# EAGLE board stm32f4mppt (EAGLE 9.6.2)
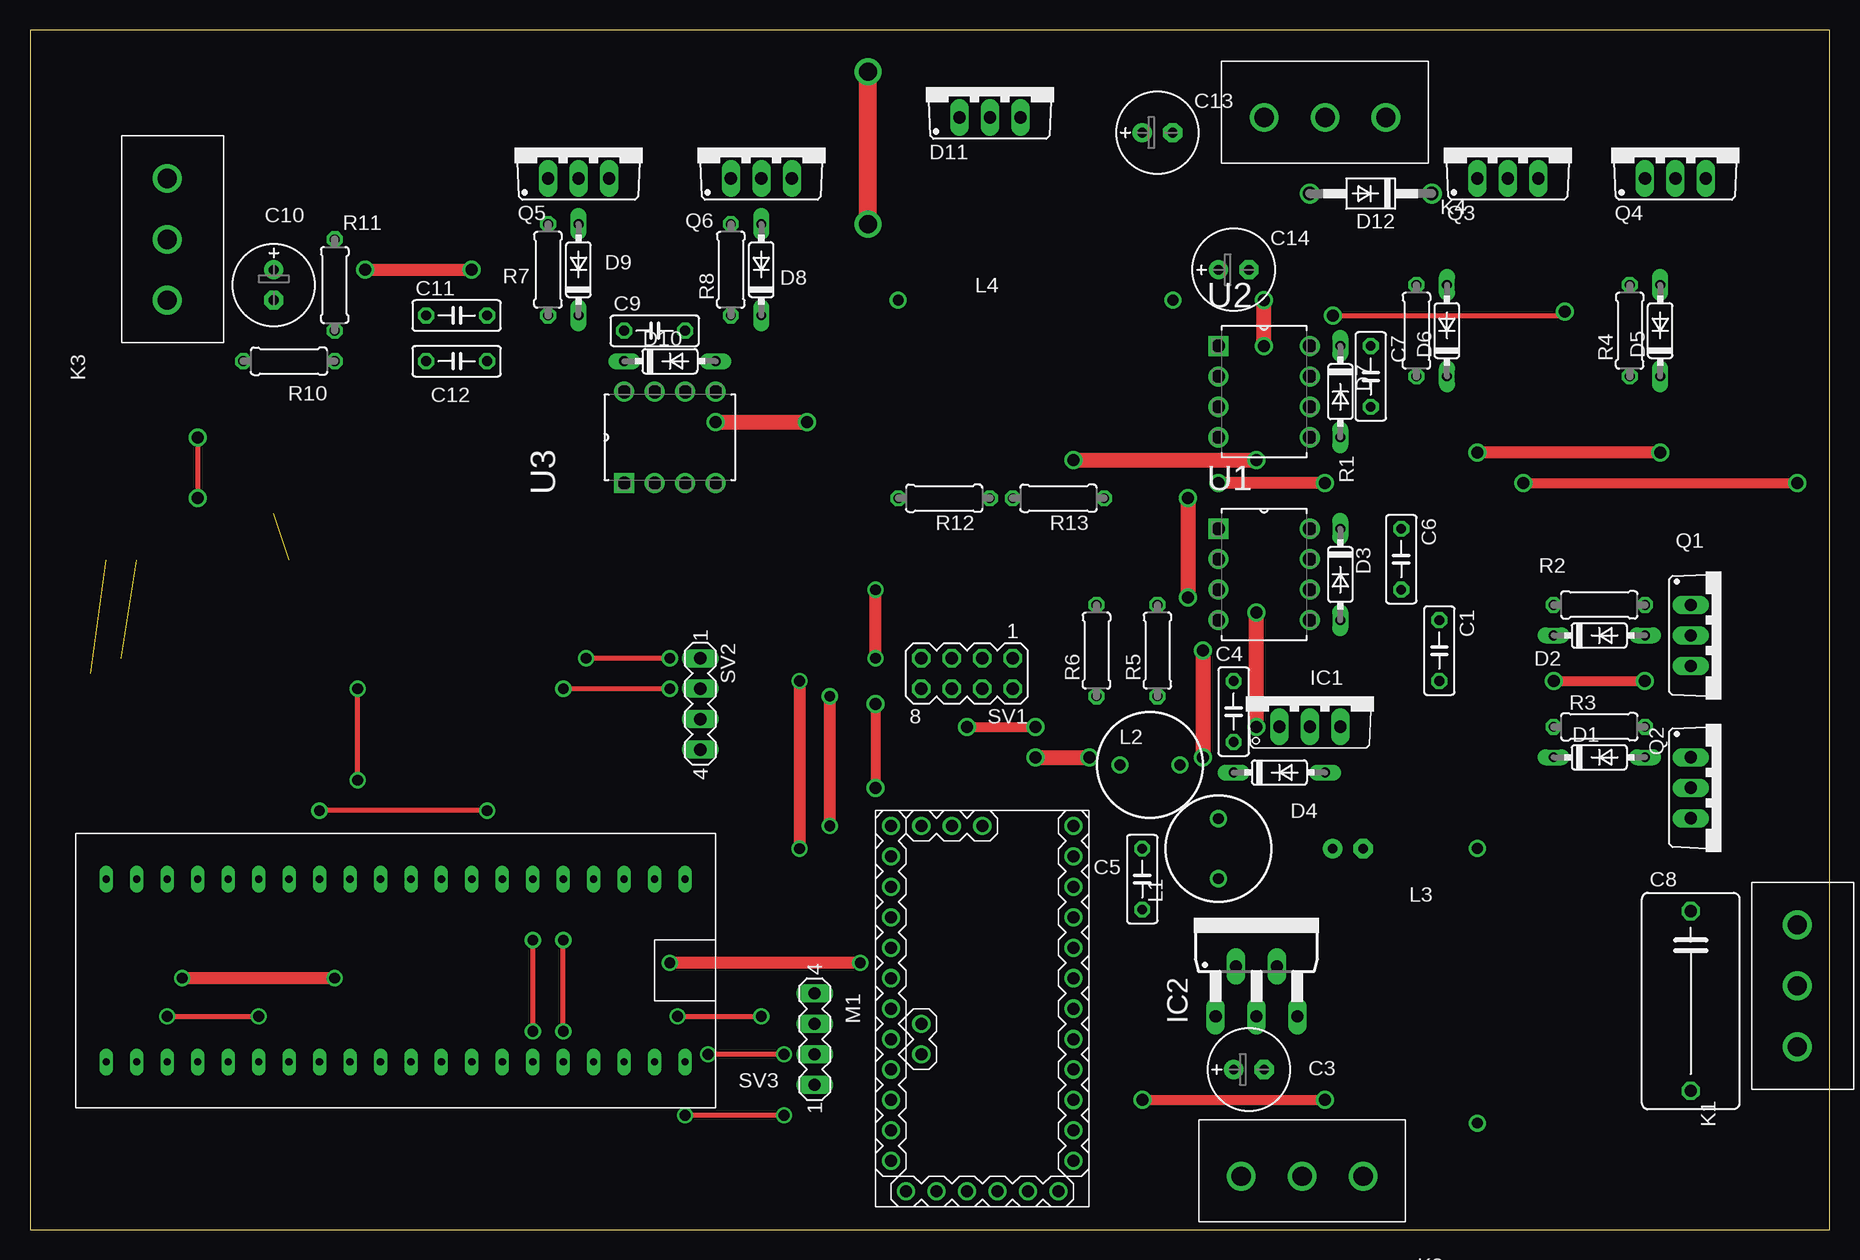
[diagram p0: board, top side]
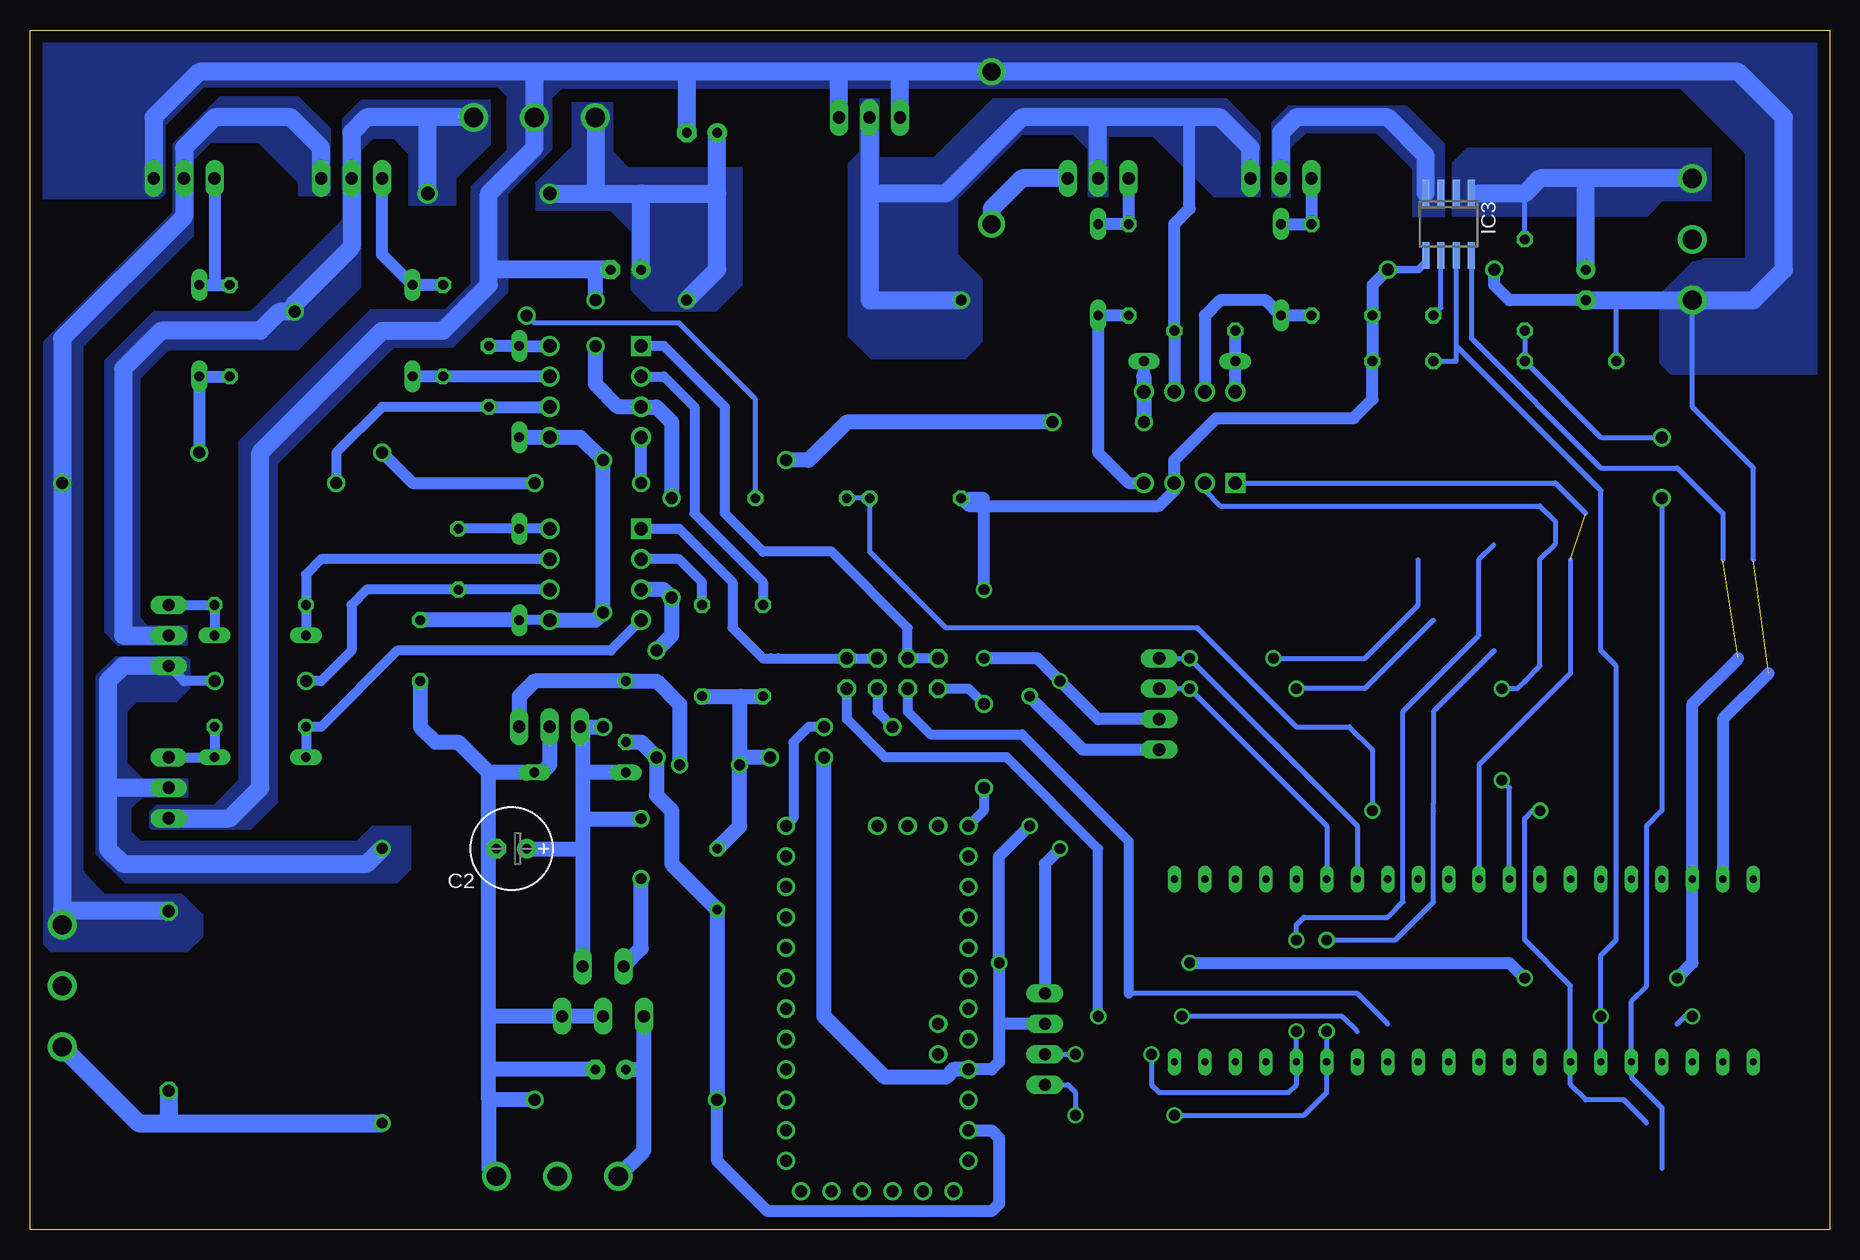
[diagram p1: board, bottom side, seen from below]

Size 150 x 100 mm. Coordinates in mm from the lower left corner, seen from the top.
Outline: 0,0 150,0 150,100 0,100 0,0
Copper layers (1*16): Top 0.035mm / dielectric 1.5mm / Bottom 0.035mm
Design rules "default": minimum track width 6mil, minimum drill 0.35mm, track to track 6mil, track to pad 6mil, pad to pad 6mil, via to via 6mil, smd to smd 6mil, copper to edge 40mil, drill to drill 6mil, minimum pad ring 10mil, minimum via ring 8mil, stop-mask expansion 4mil, vias tented up to drill 0mil, thermal gap 10mil

## Footprints (pad centres in the part's own frame; a part is rotated, then mirrored left to right if it is on the bottom)
C050-025X075 = drill 0.813 octagon: 1 -2.54,0; 2 2.54,0
E2,5-7 = drill 0.813 pad 1.6: + -1.27,0 | drill 0.813 pad 1.6 octagon: - 1.27,0
C150-084X183 = drill 1.016 octagon: 1 -7.493,0; 2 7.493,0
DO35-7 = drill 0.813 long: A 3.81,0; C -3.81,0
TO220ABS = drill 1.016 long: A1 -2.54,-2.54; A2 2.54,-2.54; C 0,-2.54
DO41-10 = drill 1.118: A 5.08,0; C -5.08,0
TO220V = drill 1.016 long: 1 -2.54,-2.54; 2 0,-2.54; 3 2.54,-2.54
T05D = drill 1.016 long: 1 -3.404,-5.08; 2 -1.702,-0.914; 3 0,-5.08; 4 1.702,-0.914; 5 3.404,-5.08
SOIC8 = smd 0.6 x 2.2: 1 -1.905,-2.6; 2 -0.635,-2.6; 3 0.635,-2.6; 4 1.905,-2.6; 5 1.905,2.6; 6 0.635,2.6; 7 -0.635,2.6; 8 -1.905,2.6
691311500103 = drill 1.6: 1 -5.08,0; 2 0,0; 3 5.08,0
6000-XXXX-RC = drill 0.9 pad 1.422: 1 -2.5,0; 2 2.5,0
TJ5-U2 = drill 0.9: 1 -11.45,0; 2 11.45,0
ARDUINO-PRO-MINI = drill 1: J1.1 -15.24,6.35; J1.2 -15.24,3.81; J1.3 -15.24,1.27; J1.4 -15.24,-1.27; J1.5 -15.24,-3.81; J1.6 -15.24,-6.35; J2.1 -1.27,5.08; J2.2 -3.81,5.08; J3.1 15.24,0; J3.2 15.24,2.54; J3.3 15.24,5.08; J6.1 -12.7,7.62; J6.2 -10.16,7.62; J6.3 -7.62,7.62; J6.4 -5.08,7.62; J6.5 -2.54,7.62; J6.6 0,7.62; J6.7 2.54,7.62; J6.8 5.08,7.62; J6.9 7.62,7.62; J6.10 10.16,7.62; J6.11 12.7,7.62; J6.12 15.24,7.62; J7.1 15.24,-7.62; J7.2 12.7,-7.62; J7.3 10.16,-7.62; J7.4 7.62,-7.62; J7.5 5.08,-7.62; J7.6 2.54,-7.62; J7.7 0,-7.62; J7.8 -2.54,-7.62; J7.9 -5.08,-7.62; J7.10 -7.62,-7.62; J7.11 -10.16,-7.62; J7.12 -12.7,-7.62
TO220BV = drill 1.016 long: D 0,-2.54; G -2.54,-2.54; S 2.54,-2.54
0207/7 = drill 0.813 octagon: 1 -3.81,0; 2 3.81,0
MA04-2 = drill 1.016 octagon: 1 -3.81,-1.27; 2 -3.81,1.27; 3 -1.27,-1.27; 4 -1.27,1.27; 5 1.27,-1.27; 6 1.27,1.27; 7 3.81,-1.27; 8 3.81,1.27
MA04-1 = drill 1.016 long: 1 -3.81,0; 2 -1.27,0; 3 1.27,0; 4 3.81,0
DIP254P762X533-8 = drill 1.118 square: 1 -7.62,7.62 | drill 1.118: 2 -7.62,5.08; 3 -7.62,2.54; 4 -7.62,0; 5 0,0; 6 0,2.54; 7 0,5.08; 8 0,7.62
KIT_STM32F103 = drill 0.6 long: 1 -24.13,-7.62; 2 -21.59,-7.62; 3 -19.05,-7.62; 4 -16.51,-7.62; 5 -13.97,-7.62; 6 -11.43,-7.62; 7 -8.89,-7.62; 8 -6.35,-7.62; 9 -3.81,-7.62; 10 -1.27,-7.62; 11 1.27,-7.62; 12 3.81,-7.62; 13 6.35,-7.62; 14 8.89,-7.62; 15 11.43,-7.62; 16 13.97,-7.62; 17 16.51,-7.62; 18 19.05,-7.62; 19 21.59,-7.62; 20 24.13,-7.62; 21 24.13,7.62; 22 21.59,7.62; 23 19.05,7.62; 24 16.51,7.62; 25 13.97,7.62; 26 11.43,7.62; 27 8.89,7.62; 28 6.35,7.62; 29 3.81,7.62; 30 1.27,7.62; 31 -1.27,7.62; 32 -3.81,7.62; 33 -6.35,7.62; 34 -8.89,7.62; 35 -11.43,7.62; 36 -13.97,7.62; 37 -16.51,7.62; 38 -19.05,7.62; 39 -21.59,7.62; 40 -24.13,7.62

## Placement (x,y rotation side)
C1  104  [C050-025X075]  117.47,48.26 270 top
C2  330u  [E2,5-7]  109.86,31.75 180 bottom
C3  100u  [E2,5-7]  101.6,13.34 0 top
C4  104  [C050-025X075]  100.33,43.18 270 top
C5  104  [C050-025X075]  92.71,29.21 270 top
C6  104  [C050-025X075]  114.3,55.88 270 top
C7  104  [C050-025X075]  111.76,71.12 270 top
C8  104  [C150-084X183]  138.43,19.05 270 top
C9  104  [C050-025X075]  52.07,74.93 0 top
C10  100u  [E2,5-7]  20.32,78.74 270 top
C11  104  [C050-025X075]  35.56,76.2 0 top
C12  104  [C050-025X075]  35.56,72.39 0 top
C13  330u  [E2,5-7]  93.98,91.44 0 top
C14  330u  [E2,5-7]  100.33,80.01 0 top
D1  1N4148DO35-7  [DO35-7]  130.81,39.37 0 top
D2  1N4148DO35-7  [DO35-7]  130.81,49.53 0 top
D3  1N4148DO35-7  [DO35-7]  109.22,54.61 270 top
D4  1N4148DO35-7  [DO35-7]  104.14,38.1 0 top
D5  1N4148DO35-7  [DO35-7]  135.89,74.93 90 top
D6  1N4148DO35-7  [DO35-7]  118.11,74.93 90 top
D7  1N4148DO35-7  [DO35-7]  109.22,69.85 270 top
D8  1N4148DO35-7  [DO35-7]  60.96,80.01 90 top
D9  1N4148DO35-7  [DO35-7]  45.72,80.01 90 top
D10  1N4148DO35-7  [DO35-7]  53.34,72.39 0 top
D11  [TO220ABS]  80.01,95.25 0 top
D12  [DO41-10]  111.76,86.36 180 top
IC1  7805TV  [TO220V]  106.68,44.45 0 top
IC2  LM2596T  [T05D]  102.23,22.86 0 top
IC3  ACS712-LC  [SOIC8]  31.75,83.82 180 bottom
K1  691311500103  [691311500103]  147.32,20.32 90 top
K2  691311500103  [691311500103]  106.05,4.45 180 top
K3  691311500103  [691311500103]  11.43,82.55 90 top
K4  691311500103  [691311500103]  107.95,92.71 180 top
L1  [6000-XXXX-RC]  99.06,31.75 90 top
L2  [6000-XXXX-RC]  93.34,38.73 180 top
L3  [TJ5-U2]  120.65,20.32 270 top
L4  [TJ5-U2]  83.82,77.47 0 top
M1  ARDUINO-PRO-MINI-5.0V  [ARDUINO-PRO-MINI]  79.38,18.41 90 top
Q1  IRF540  [TO220BV]  140.97,49.53 270 top
Q2  IRF540  [TO220BV]  140.97,36.83 270 top
Q3  IRF540  [TO220BV]  123.19,90.17 0 top
Q4  IRF540  [TO220BV]  137.16,90.17 0 top
Q5  IRF540  [TO220BV]  45.72,90.17 0 top
Q6  IRF540  [TO220BV]  60.96,90.17 0 top
R1  330R  [0207/7]  115.57,74.93 90 top
R2  330R  [0207/7]  130.81,52.07 0 top
R3  330R  [0207/7]  130.81,41.91 0 top
R4  330R  [0207/7]  133.35,74.93 90 top
R5  330R  [0207/7]  93.98,48.26 90 top
R6  330R  [0207/7]  88.9,48.26 90 top
R7  330R  [0207/7]  43.18,80.01 90 top
R8  330R  [0207/7]  58.42,80.01 90 top
R10  1k  [0207/7]  21.59,72.39 180 top
R11  10k  [0207/7]  25.4,78.74 270 top
R12  1k  [0207/7]  76.2,60.96 180 top
R13  10k  [0207/7]  85.72,60.96 180 top
SV1  [MA04-2]  78.11,46.35 180 top
SV2  [MA04-1]  55.88,43.81 270 top
SV3  [MA04-1]  65.41,15.88 90 top
U1  IR2184  [DIP254P762X533-8]  106.68,50.8 0 top
U2  IR2184  [DIP254P762X533-8]  106.68,66.04 0 top
U3  IR2184  [DIP254P762X533-8]  57.15,69.85 90 top
U$1  KIT_STM32F103  [KIT_STM32F103]  30.48,21.59 180 top

## Library data of the parts
C1-C14 = rcl; SPICEPREFIX: C
D1-D12 = diode
IC1 = linear
IC2 = national-semiconductor; MPN: LM2596T-ADJ/LF02; OC_FARNELL: 9494162; OC_NEWARK: 65K5910
IC3 = allegro-2
K1-K4 = Wurth_Elektronik_Electromechanic_Terminal_Blocks_Connectors_rev15c
L1-L4 = rcl; SPICEPREFIX: L
M1 = diy-modules
Q1-Q6 = transistor-power
R1-R8 R10-R13 = rcl; SPICEPREFIX: R
SV1-SV3 = con-lstb; OC_FARNELL: unknown; OC_NEWARK: unknown
U1-U3 = IR2184; AVAILABILITY: In Stock; DESCRIPTION: Half-Bridge Gate Driver IC Non-Inverting 8-SOIC; MF: Infineon; MP: IR2184; PACKAGE: DIP-8 International Rectifier; PRICE: None
U$1 = kit stm32

## Nets
+12V: C1.1 C2.+ D3.A D4.C D7.A D10.A IC1.1 IC2.4 L1.2 U1.5 U2.5 U3.5
BUCK: U3.1 U$1.11
EN: U3.2 U$1.12
GND: C1.2 C2.- C3.- C4.2 C5.2 C10.- C11.2 C12.2 C13.- C14.- D4.A D11.A1 D11.A2 IC1.2 IC2.3 IC2.5 IC3.5 K2.1 K3.1 K4.2 M1.J6.2 Q2.S Q4.S Q6.S R10.2 R12.2 SV2.3 SV3.4 U1.3 U2.3 U3.3 U$1.19
GND.1: M1.J7.9
I_MATTROI: C12.1 IC3.7 U$1.26
IN1: SV1.5 SV1.7 U2.1
IN2: SV1.1 SV1.3 U1.1
N$1: D2.A Q1.G R2.2
N$2: C4.1 IC1.3 L2.1
N$3: D1.A Q2.G R3.2
N$4: D1.C R3.1 U1.4
N$5: D2.C R2.1 U1.7
N$6: C6.1 D3.C U1.8
N$7: D6.A Q3.G R1.2
N$8: IC2.2 L1.1
N$9: D5.A Q4.G R4.2
N$10: D5.C R4.1 U2.4
N$11: D6.C R1.1 U2.7
N$12: C7.1 D7.C U2.8
N$13: C8.2 K1.1 L3.2
N$14: R5.2 U1.2
N$15: R6.2 U2.2
N$16: D9.A Q5.G R7.2
N$17: D8.A Q6.G R8.2
N$18: D8.C R8.1 U3.4
N$19: D9.C R7.1 U3.7
N$20: C9.1 D10.C U3.8
N$21: IC3.3 IC3.4 Q5.D
N$22: C10.+ IC3.1 IC3.2 K3.3 R11.1
N$23: C11.1 IC3.6
N$24: C13.+ C14.+ D12.A K4.3 L4.2
N$25: D12.C K4.1 Q1.D Q3.D R13.1
N$29: U$1.28
PWM1: M1.J6.12 SV1.8
PWM2: M1.J7.1 SV1.4
PWM3: SV1.6
PWM4: SV1.2
RAW: M1.J6.1
RX: SV2.2 U$1.6
SCL: SV3.1 U$1.35
SDA: SV3.2 U$1.36
TX: SV2.1 U$1.7
V_DC_OUT: R12.1 R13.2 U$1.27
V_MATTROI: R10.1 R11.2 U$1.25
VCC: C5.1 IC3.8 L2.2 M1.J6.4 R5.1 R6.1 SV2.4 SV3.3 U$1.18
VDD: C3.+ IC2.1 K2.3
VS1: C7.2 C8.1 K1.3 Q3.S Q4.D U2.6
VS2: C6.2 L3.1 Q1.S Q2.D U1.6
VS3: C9.2 D11.C L4.1 Q5.S Q6.D U3.6

## Tracks (layer width: path | path; a pad name or v marks a point on that pad's centre or on a via)
+12V  (via drill 1)
  Top 1.27: v102.23,41.91 v102.23,51.44 | v57.15,67.31 v64.77,67.31 | v87,64.14 v102.23,64.14
  Bottom 0.813: D3.A U1.5 105.41,50.8 | 102.87,64.77 104.14,66.04
  Bottom 1.016: U3.5 57.15,71.12 D10.A
  Bottom 1.27: 103.94,34.29 103.94,31.75 | 103.94,31.75 IC2.4 | 103.94,38.1 103.94,41.71 IC1.1 v102.23,41.91 | 103.94,38.1 103.94,34.29 | 103.94,34.29 103.9,34.25 L1.2 | D4.C 103.94,38.1 | U1.5 102.87,50.8 v102.23,51.44 v102.23,64.14 104.14,66.04 U2.5 D7.A | 57.15,71.12 v57.15,67.31 | v64.77,67.31 81.92,67.31 85.09,64.14 v87,64.14 | D3.A C1.1 | C2.+ 103.94,31.75
BUCK  (1 unrouted)
  Bottom 0.406: U3.1 22.86,62.23 20.32,59.69 | 21.59,55.82 21.59,46.35 29.21,38.73 U$1.11
EN  (via drill 0.9)
  Top 0.406: v27.3,37.47 v27.3,45.09
  Bottom 0.406: U3.2 52.07,61.59 50.8,60.33 24.13,60.33 22.86,59.05 22.86,57.15 24.13,55.88 24.13,46.99 24.45,46.67 25.08,46.04 | 25.4,45.72 25.08,46.04 | U$1.12 26.67,36.83 v27.3,37.47 | v27.3,45.09 26.04,45.09 25.08,46.04
GND  (via drill 0.9, 1, 1.5)  (1 unrouted)
  Top 0.813: v92.71,10.79 v107.95,10.79
  Top 1.016: v27.94,80.01 v36.83,80.01 | v64.14,45.72 v64.14,31.75 | v70.48,47.62 v70.48,53.34
  Top 1.27: v96.52,60.96 v96.52,52.7 | v97.79,48.26 v97.79,39.37 | v102.87,73.66 v102.87,77.47
  Top 1.5: v69.85,83.82 v69.85,96.52
  Bottom 0.406: K3.1 11.43,68.58 6.35,63.5 6.35,55.82 | R10.2 17.78,77.47 | R12.2 72.07,60.64 71.75,60.33
  Bottom 0.61: IC3.5 33.66,80.64 34.29,80.01 v36.83,80.01
  Bottom 1.016: C10.- 26.67,77.47 27.94,78.74 v27.94,80.01 | v36.83,80.01 38.1,78.74 C11.2 C12.2 38.1,69.22 39.69,67.63 51.12,67.63 54.61,64.14 U3.3 54.61,61.59 55.88,60.33 71.75,60.33 R12.2 | U$1.19 8.89,42.55 5.08,46.35 | M1.J6.2 69.85,8.26 69.22,7.62 69.22,2.16 69.85,1.52 88.52,1.52 92.71,5.71 v92.71,10.79 | SV2.3 60.96,42.55 v64.14,45.72 66.04,47.62 v70.48,47.62 | v64.14,31.75 65.41,30.48 SV3.4 | v70.48,53.34 70.48,60.96 71.75,60.96 72.07,60.64
  Bottom 1.27: 111.76,17.78 IC2.5 IC2.3 | 111.76,10.79 111.76,5.08 K2.1 | 111.76,17.78 111.76,31.75 | 111.76,31.75 111.76,38.1 | 111.76,38.1 114.3,40.64 116.2,40.64 117.47,41.91 C1.2 | 111.76,38.1 D4.A 107.31,38.1 106.68,38.73 IC1.2 | v107.95,10.79 111.76,10.79 | 111.76,10.79 111.76,13.34 | 111.76,13.34 111.76,17.78 | C3.- 111.76,13.34 | C4.2 99.06,40.64 v97.79,39.37 97.79,36.2 96.52,34.92 96.52,30.48 C5.2 v92.71,10.79 | U1.3 97.16,53.34 v96.52,52.7 96.52,49.53 v97.79,48.26 | v96.52,60.96 96.52,67.31 97.79,68.58 U2.3 100.97,68.58 102.87,70.48 v102.87,73.66 | v102.87,77.47 102.87,80.01 | C2.- 111.76,31.75
  Bottom 1.5: C10.- 17.78,77.47 K3.1 6.35,77.47 3.81,80.01 3.81,92.71 7.62,96.52 v69.85,96.52 77.47,96.52 | 77.47,96.52 82.55,96.52 | D11.A1 77.47,96.52 | D11.A2 82.55,96.52 | Q6.S 67.31,87.63 69.85,85.09 v69.85,83.82 | Q4.S 139.7,92.71 135.89,96.52 107.95,96.52 | 82.55,96.52 95.25,96.52 | 95.25,96.52 107.95,96.52 | C13.- 95.25,96.52 | Q2.S 133.35,34.29 130.81,36.83 130.81,64.77 120.65,74.93 115.57,74.93 111.76,78.74 111.76,80.01 | 111.76,80.01 111.76,86.36 107.95,90.17 K4.2 107.95,96.52 | C14.- 102.87,80.01 111.76,80.01
  pour Bottom (isolate 0.61, no thermals): 139.86,33.34 140.02,33.5 140.02,34.77 139.38,35.4 134.62,35.4 132.56,37.47 132.56,65.72 121.6,76.68 115.41,76.68 113.19,78.9 113.19,87 110.17,90.01 110.17,94.46 110.97,95.25 135.57,95.25 138.75,92.08 138.75,86.36 139.22,85.88 150.02,85.88 150.02,100.01 0,100.01 0,71.28 13.18,71.28 14.13,72.23 14.13,77.95 11.11,80.96 6.99,80.96 6.99,89.69 12.38,95.09 105.73,95.09 106.52,94.3 106.52,90.01 110.17,86.36 110.17,78.11 114.78,73.5 119.7,73.5 129.38,63.82 129.38,35.56 131.6,33.34
I_MATTROI  (via drill 0.9)
  Top 0.406: v11.43,17.78 v19.05,17.78
  Bottom 0.406: 31.11,73.66 31.11,72.39 C12.1 | 31.11,73.66 IC3.7 | 31.11,73.66 19.05,61.59 19.05,48.26 17.78,46.99 17.78,24.13 19.05,22.86 v19.05,17.78 U$1.26 | 12.7,17.14 12.06,17.78 v11.43,17.78
IN1
  Bottom 0.813: SV1.7 SV1.5 76.83,50.16 83.19,56.52 88.9,56.52 92.08,59.69 92.08,68.58 97.16,73.66 U2.1
IN2
  Bottom 0.813: SV1.3 SV1.1 87.63,47.62 88.27,47.62 88.9,47.62 91.44,50.16 91.44,53.98 95.89,58.42 U1.1
N$1
  Bottom 0.813: D2.A R2.2 Q1.G
N$2
  Bottom 1.27: IC1.3 109.22,44.45 107.95,45.72 C4.1 97.79,45.72 95.84,43.77 L2.1
N$3
  Bottom 0.813: Q2.G D1.A R3.2
N$4
  Bottom 0.813: D1.C R3.1 125.73,41.91 119.38,48.26 101.6,48.26 U1.4
N$5
  Bottom 0.813: D2.C R2.1 127,54.61 125.73,55.88 U1.7
N$6
  Bottom 0.813: U1.8 D3.C C6.1
N$7
  Bottom 1.016: R1.2 D6.A 120.65,81.28 Q3.G
N$8
  Bottom 1.27: IC2.2 99.06,23.42 L1.1
N$9
  Bottom 1.016: D5.A 134.62,78.74 | 134.62,78.74 R4.2 | Q4.G 134.62,78.74
N$10  (via drill 1)
  Top 1.016: v135.89,64.77 v120.65,64.77 | v107.95,62.23 v99.06,62.23
  Bottom 1.016: R4.1 D5.C v135.89,64.77 | v120.65,64.77 118.11,62.23 v107.95,62.23 | v99.06,62.23 U2.4
N$11
  Bottom 1.016: U2.7 R1.1 D6.C
N$12
  Bottom 1.016: U2.8 D7.C C7.1
N$13
  Bottom 1.5: K1.1 140.95,8.87 138.43,8.87 | 138.43,8.87 L3.2 | C8.2 138.43,8.87
N$14
  Bottom 0.813: R5.2 93.98,53.98 95.89,55.88 U1.2
N$15
  Bottom 0.813: U2.2 97.16,71.12 96.84,70.8 95.89,69.85 94.61,68.58 94.61,59.69 88.9,53.98 R6.2
N$16
  Bottom 1.016: Q5.G R7.2 D9.A
N$17
  Bottom 1.016: Q6.G R8.2 D8.A
N$18
  Bottom 1.016: R8.1 D8.C 60.96,64.77 58.42,62.23 U3.4
N$19
  Bottom 1.016: R7.1 D9.C 46.99,77.47 50.8,77.47 52.07,76.2 U3.7
N$20
  Bottom 1.016: U3.8 D10.C C9.1
N$21
  Bottom 1.5: IC3.4 33.66,89.53 36.83,92.71 44.45,92.71 45.72,91.44 Q5.D
  pour Bottom (no thermals): 32.07,84.45 32.07,90.49 34.92,93.34 35.24,93.66 45.09,93.66 46.51,92.23 46.51,86.36 46.51,86.04 44.93,86.04 44.93,90.17 43.66,91.44 37.78,91.44 35.4,89.06 34.77,88.42 34.77,84.45
N$22
  Bottom 0.406: R11.1 25.4,86.36
  Bottom 1.5: K3.3 20.32,87.63 | 20.32,87.63 24.13,87.63 25.4,86.36 29.21,86.36 | C10.+ 20.32,87.63
  pour Bottom (no thermals): 9.84,85.72 13.97,85.72 15.24,84.45 31.43,84.45 31.43,88.9 30.16,90.17 9.84,90.17
N$23
  Bottom 0.406: C11.1 32.38,76.83 IC3.6
N$24
  Bottom 1.5: L4.2 92.71,80.03 92.71,86.36 | 92.71,86.36 C13.+ | D12.A 102.87,86.36 | 102.87,86.36 99.06,86.36 | 99.06,86.36 92.71,86.36 | C14.+ 99.06,86.36 | K4.3 102.87,86.36
  pour Bottom (isolate 0.61, no thermals): 92.87,76.52 98.11,76.52 99.85,78.26 99.85,83.19 101.6,84.93 107.79,84.93 107.79,87.31 104.78,90.33 104.78,93.98 101.44,93.98 101.44,89.85 100.17,88.58 90.65,88.58 90.65,78.74
N$25  (via drill 1)
  Top 0.406: v108.58,76.2 127.64,76.2 v127.95,76.52
  Bottom 0.406: R13.1 89.53,69.22 95.89,75.56 107.95,75.56 v108.58,76.2
  Bottom 1.5: Q1.D 142.24,49.53 142.24,71.75 139.06,74.93 130.81,74.93 129.22,76.52 v127.95,76.52 127.95,77.15 123.19,81.92 Q3.D 123.19,91.44 121.92,92.71 116.84,92.71 | K4.1 116.84,92.71 | D12.C 116.84,92.71
  pour Bottom (isolate 0.61, no thermals): 114.46,85.41 114.46,87.63 111.6,90.49 111.6,94.14 122.4,94.14 123.98,92.55 123.98,84.14 131.6,76.52 139.7,76.52 143.83,72.39 143.83,49.85 142.72,48.74 136.84,48.74 136.84,50.32 140.18,50.32 140.81,50.96 140.81,70.96 138.43,73.34 127.64,73.34 122.4,78.58 122.4,90.01 121.44,90.96 119.7,90.96 118.43,89.69 118.43,85.41
PWM1  (via drill 1)
  Top 0.813: v70.48,43.81 v70.48,36.83
  Bottom 0.813: SV1.8 71.75,45.09 v70.48,43.81 | v70.48,36.83 70.48,34.92 M1.J6.12
PWM2  (via drill 1)
  Top 0.813: v78.11,41.91 v83.82,41.91
  Bottom 0.813: SV1.4 79.38,43.18 v78.11,41.91 | v83.82,41.91 85.09,41.91 86.36,40.64 86.36,34.29 M1.J7.1
PWM3
  Bottom 0.406: 58.42,19.68 39.37,19.68 36.83,17.14
  Bottom 0.813: SV1.6 76.83,43.18 74.93,41.27 67.31,41.27 58.42,32.38 58.42,19.68
PWM4  (via drill 0.9)
  Top 0.406: v53.98,17.78 v60.96,17.78
  Bottom 0.406: v53.98,17.78 40.64,17.78 39.37,16.51
  Bottom 0.813: v60.96,17.78 60.96,31.75 68.58,39.37 78.74,39.37 81.92,42.55 SV1.2
RX  (via drill 0.9)
  Top 0.406: v44.45,45.09 v53.34,45.09
  Bottom 0.406: SV2.2 v53.34,45.09 41.91,33.66 U$1.6 | v44.45,45.09 38.73,45.09 33.02,50.8
SCL  (via drill 0.9)
  Top 0.406: v62.87,9.53 v54.61,9.53 | v41.91,24.13 v41.91,16.51
  Bottom 0.406: SV3.1 63.5,12.06 62.87,11.43 v62.87,9.53 | v54.61,9.53 43.81,9.53 41.91,11.43 U$1.35 v41.91,16.51 | v41.91,24.13 36.2,24.13 33.02,27.3 33.02,34.92 33.02,35.56 33.02,43.18 27.94,48.26
SDA  (via drill 0.9)
  Top 0.406: v62.87,14.61 v56.52,14.61 | v44.45,16.51 v44.45,24.13
  Bottom 0.406: SV3.2 v62.87,14.61 | v56.52,14.61 56.52,12.06 55.88,11.43 45.09,11.43 44.45,12.06 U$1.36 v44.45,16.51 | v44.45,24.13 44.45,25.4 43.81,26.04 36.83,26.04 35.56,27.3 35.56,43.18 29.21,49.53 29.21,55.88 28,57.09
TX  (via drill 0.9)
  Top 0.406: v53.34,47.62 v46.35,47.62
  Bottom 0.406: U$1.7 39.37,33.66 v53.34,47.62 SV2.1 | v46.35,47.62 38.73,47.62 34.29,52.07 34.29,55.82
V_DC_OUT  (via drill 0.9)
  Top 0.406: v38.1,34.92 v24.13,34.92
  Bottom 0.406: R13.2 R12.1 80.01,56.52 73.66,50.16 52.7,50.16 44.45,41.91 40.01,41.91 38.1,40.01 v38.1,34.92 | 15.24,8.89 17.14,10.79 20.32,10.79 21.59,12.06 U$1.27 21.59,20.32 25.4,24.13 25.4,34.29 24.77,34.92 v24.13,34.92
V_MATTROI  (via drill 1)
  Top 0.406: v13.97,66.04 v13.97,60.96
  Bottom 0.406: R11.2 R10.1 19.05,66.04 v13.97,66.04 | v13.97,60.96 13.97,34.92 15.24,33.66 15.24,20.32 16.51,19.05 U$1.25 16.51,12.7 13.97,10.16 13.97,5.08
VCC  (via drill 0.9, 1)  (1 unrouted)
  Top 1.016: v69.22,22.23 v53.34,22.23 | v25.4,20.95 v12.7,20.95 | v66.67,33.66 v66.67,44.45
  Top 1.27: v83.82,39.37 v88.3,39.37
  Bottom 0.406: IC3.8 29.84,74.3 19.05,63.5 12.7,63.5 8.89,59.69 8.89,55.82
  Bottom 0.813: v69.22,22.23 69.22,17.14 69.22,16.51 69.22,13.97
  Bottom 1.016: v53.34,22.23 26.67,22.23 v25.4,20.95 | v12.7,20.95 11.43,22.23 U$1.18 11.43,43.81 7.62,47.62 | v66.67,33.66 69.22,31.11 v69.22,22.23 69.22,16.51 | v66.67,44.45 62.23,40.01 SV2.4 | SV3.3 69.22,17.14 69.22,13.97 69.85,13.34 M1.J6.4
  Bottom 1.27: R5.1 90.81,44.45 | 90.81,44.45 R6.1 | 90.81,39.37 90.81,38.77 L2.2 90.84,33.62 C5.1 | 90.81,39.37 90.81,44.45 | M1.J6.4 73.03,13.34 73.66,12.7 78.74,12.7 83.82,17.78 v83.82,39.37 | v88.3,39.37 90.81,39.37
VDD
  Bottom 1.27: K2.3 98.83,6.58 98.83,13.34 | 98.83,13.34 IC2.1 | C3.+ 98.83,13.34
VS1  (via drill 1)
  Top 0.813: v124.46,62.23 v147.32,62.23
  Bottom 0.813: C7.2 120.65,68.58 124.46,64.77 v124.46,62.23
  Bottom 1.016: C7.2 U2.6
  Bottom 1.5: Q3.S 125.73,90.17 128.27,92.71 134.62,92.71 137.16,90.17 Q4.D 137.16,84.45 147.32,74.3 v147.32,62.23 147.32,26.67 | 147.32,26.67 K1.3 | C8.1 147.19,26.54 147.32,26.67
  pour Bottom (isolate 0.61, no thermals): 124.94,86.2 124.94,91.76 127.64,94.46 134.14,94.46 138.11,90.49 138.11,84.77 148.91,73.98 148.91,23.81 148.27,23.18 136.84,23.18 135.57,24.45 135.57,26.19 137.32,27.94 143.83,27.94 145.26,29.53 145.57,29.84 145.57,73.66 136.37,82.87 136.37,89.22 134.94,90.65 130.97,90.65 127.64,87.31 127.64,86.2
VS2  (via drill 1)
  Top 0.813: v127,45.72 v134.62,45.72
  Bottom 0.813: U1.6 C6.2 121.92,53.34 123.19,52.07 123.19,48.26 125.73,45.72 v127,45.72 | v134.62,45.72 137.16,45.72 Q1.S
  Bottom 1.5: Q1.S 142.24,46.99 143.51,45.72 143.51,36.83 | 143.51,36.83 143.51,31.75 142.24,30.48 121.94,30.48 L3.1 | Q2.D 143.51,36.83
  pour Bottom (isolate 0.61, no thermals): 118.27,30 119.38,28.89 142.08,28.89 144.46,31.27 144.46,46.2 142.88,47.78 137,47.78 136.68,47.47 136.68,45.09 137.79,43.97 141.13,43.97 141.92,43.18 141.92,38.89 140.65,37.62 136.84,37.62 136.84,36.04 140.65,36.04 141.6,35.08 141.6,33.18 140.81,32.38 122.71,32.38 121.44,33.66 118.27,33.66
VS3
  Bottom 1.016: U3.6 C9.2 54.61,83.82 53.34,85.09 53.34,92.71
  Bottom 1.5: Q5.S 48.26,90.17 50.8,92.71 53.34,92.71 60.96,92.71 | 60.96,92.71 67.31,92.71 73.66,86.36 80.01,86.36 | L4.1 80.01,77.47 80.01,86.36 | Q6.D 60.96,92.71 | D11.C 80.01,86.36
  pour Bottom (isolate 0.61, no thermals): 47.47,86.04 51.28,86.04 56.36,91.12 60.17,91.12 60.17,86.04 61.75,86.04 61.75,90.01 63.02,91.28 67.31,91.28 72.71,85.88 72.71,81.28 70.64,79.22 70.64,73.98 72.07,72.55 79.85,72.55 81.76,74.45 81.76,88.9 80.8,89.85 80.8,94.3 79.22,94.3 79.22,89.38 74.61,89.38 69.69,94.3 50.32,94.3 47.47,91.44